# Altium PCB bt-fpc-pvt2b.PcbDoc
Units mm, origin at the board's own origin, x right, y up, seen from the top; angles counter-clockwise.
Board outline 26.25 x 79.45 mm, 2 copper layers (Top Layer, Bottom Layer), stack 0.108 mm thick; 22 components, 19 nets, 83 pads, 23 vias.
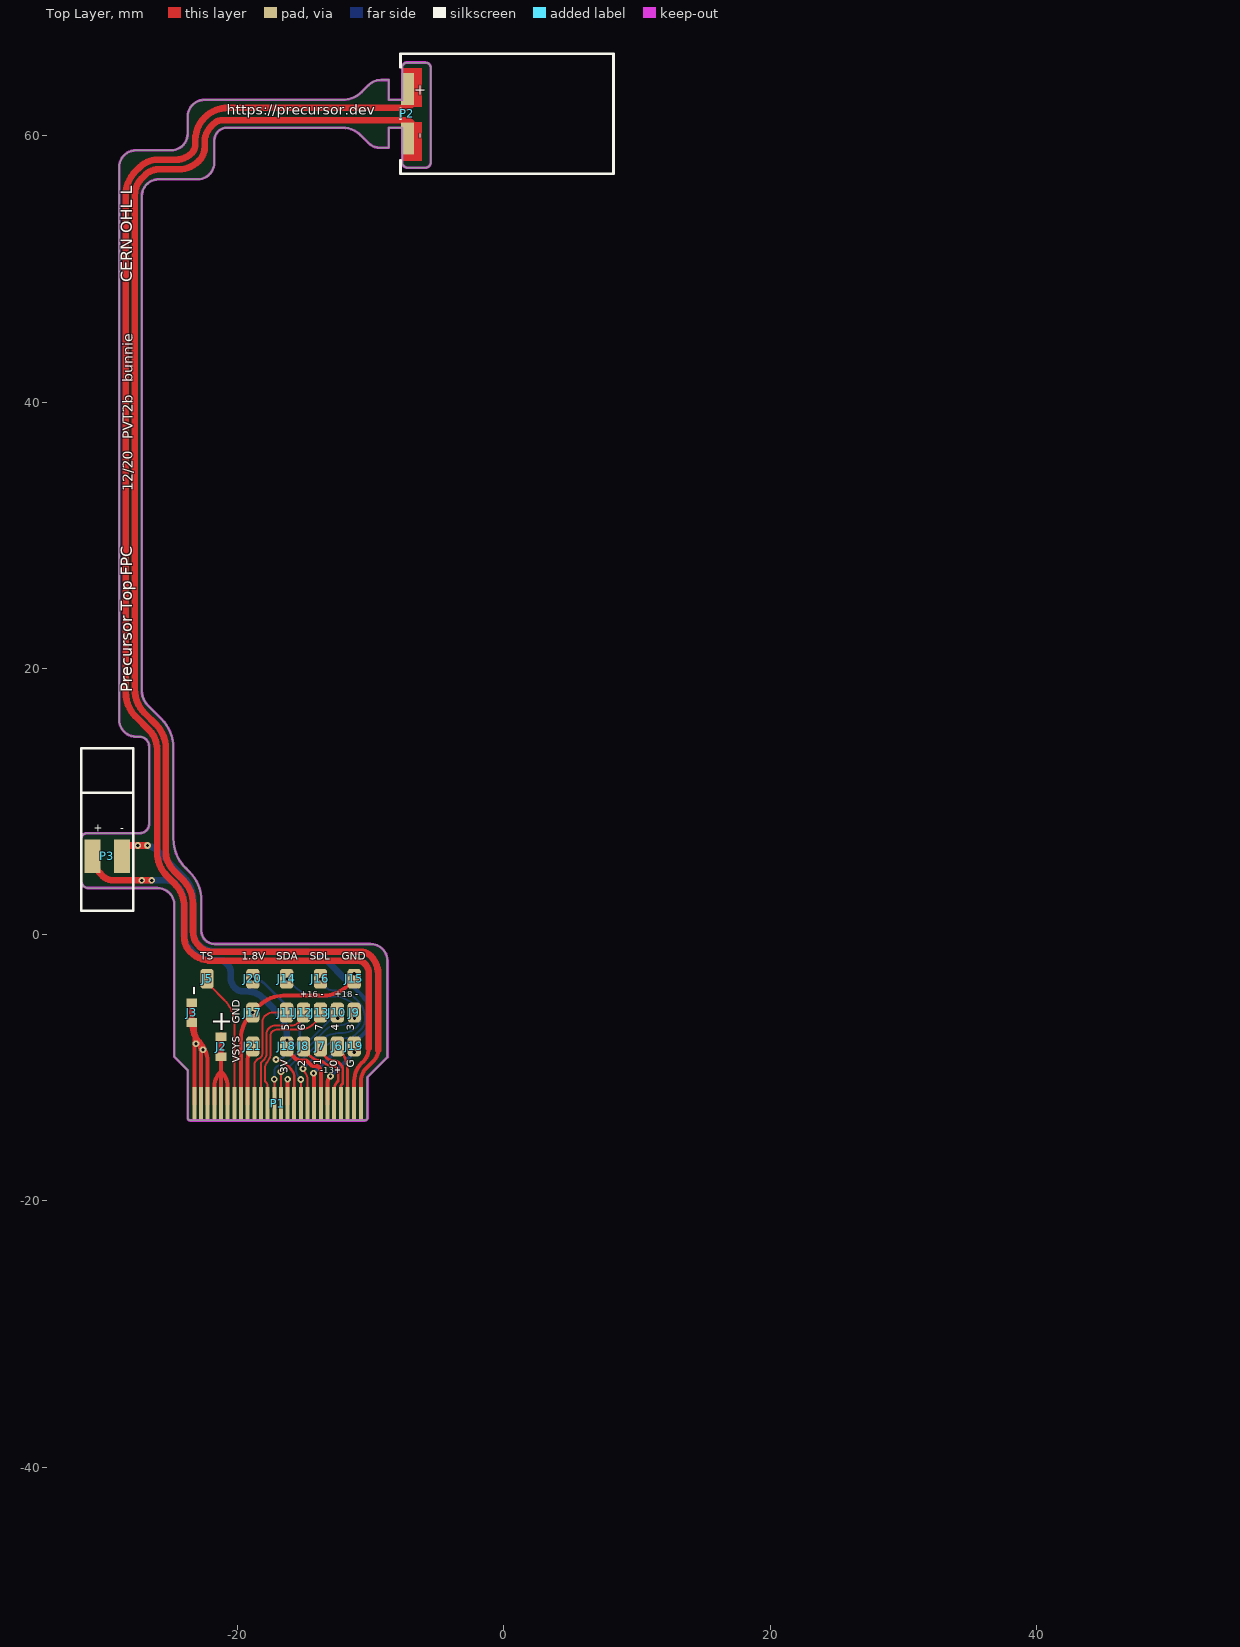
[diagram p0: Top Layer view]
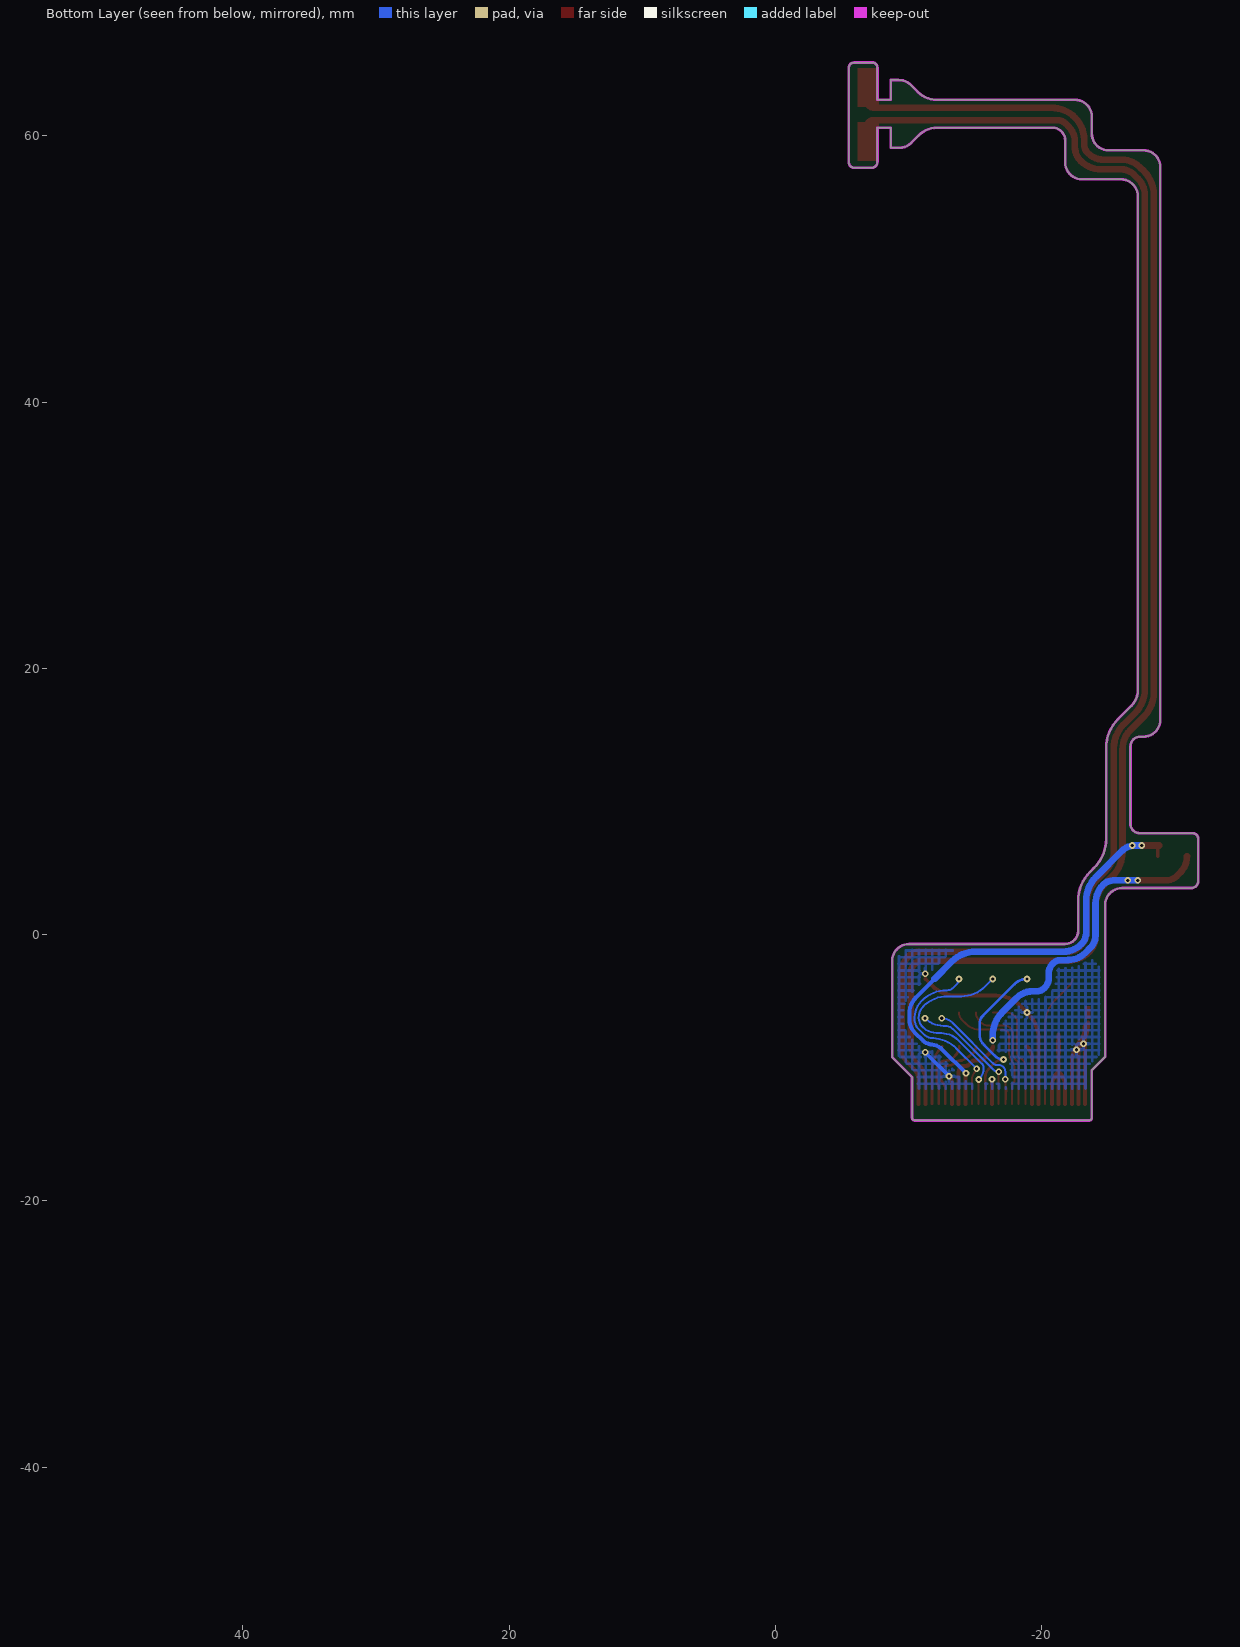
[diagram p1: Bottom Layer view, seen from below]

## Layer stack, top to bottom
Top Coverlay: solder mask 0.012, Dk 4
Top Layer: signal copper 0.02
Dielectric 2: prepreg 0.028, Composite dielectric, Dk 3.952
Dielectric 1: prepreg 0.012, Composite dielectric, Dk 3.952
Dielectric 3: prepreg 0.028, Composite dielectric, Dk 3.952
Bottom Layer: signal copper 0.02
Bottom Coverlay: solder mask 0.012, Dk 4

## Board outline
-31.2,3.5 cw(c-31.2,4.05) -31.75,4.05 -31.75,7.175 cw(c-31.3,7.175) -31.3,7.625 -27.35,7.625 ccw(c-27.35,8.325) -26.65,8.325 -26.65,14.125 ccw(c-27.4,14.125) -27.4,14.875 -27.63,14.875 cw(c-27.63,16.145) -28.9,16.145 -28.9,57.633 cw(c-27.63,57.633) -27.63,58.903 -25.023,58.903 cw(c-25.023,58.9) -25.02,58.9 ccw(c-25.02,60.17) -23.75,60.17 -23.75,61.43 cw(c-22.48,61.43) -22.48,62.7 -12.109,62.7 ccw(c-12.109,64.714) -10.685,63.29 -10.175,63.8 cw(c-9.232,62.857) -9.232,64.191 -8.65,64.191 -8.65,62.7 -7.65,62.7 -7.65,65.12 cw(c-7.27,65.12) -7.27,65.5 -5.9,65.5 cw(c-5.9,65.1) -5.5,65.1 -5.5,58 cw(c-5.9,58) -5.9,57.6 -7.22,57.6 cw(c-7.22,58.03) -7.65,58.03 -7.65,60.6 -8.65,60.6 -8.65,59.1 -9.33,59.1 cw(c-9.33,60.295) -10.175,59.45 -10.77,60.045 ccw(c-12.109,58.707) -12.109,60.6 -20.8,60.6 ccw(c-20.8,59.65) -21.75,59.65 cw(c-21.755,59.645) -21.748,59.645 -21.748,57.995 cw(c-23.018,57.995) -23.018,56.725 -25.93,56.725 ccw(c-25.93,55.455) -27.2,55.455 -27.2,18.347 ccw(c-25.578,18.347) -26.725,17.2 -25.723,16.198 cw(c-27.891,14.03) -24.825,14.03 -24.825,7.195 ccw(c-21.759,7.195) -23.927,5.027 -23.827,4.927 -23.623,4.723 cw(c-25.791,2.555) -22.725,2.555 -22.725,0.3 ccw(c-21.725,0.3) -21.725,-0.7 -10.02,-0.7 cw(c-10.02,-1.97) -8.75,-1.97 -8.75,-9.2 -10.25,-10.7 -10.25,-13.75 cw(c-10.45,-13.75) -10.45,-13.95 -23.55,-13.95 cw(c-23.55,-13.75) -23.75,-13.75 -23.75,-10.175 -24.75,-9.175 -24.75,-0.675 -24.75,2.23 ccw(c-26.02,2.23) -26.02,3.5

## Design rules (kind name [scope] priority, off if disabled: settings)
BoardOutlineClearance [All] p1: gap=0.2 ignorepadtopadclearanceinfootprint=FALSE except(0: Arc-SplitContinuation Track-SplitContinuation SMDPad-SplitContinuation THPad-SplitContinuation Via-SplitContinuation Fill-SplitContinuation Poly-SplitContinuation Region-SplitContinuation Text-SplitContinuation)
Clearance Clearance_2 [InPolygon] p1: gap=0.25 ignorepadtopadclearanceinfootprint=FALSE except(0: Arc-Hole Track-Hole SMDPad-Hole THPad-Hole Via-Hole Fill-Hole Poly-Hole Region-Hole Text-Hole)
Clearance Clearance_1 [InComponent('P1') vs OnLayer('Keep-Out Layer')] p2: gap=0 ignorepadtopadclearanceinfootprint=FALSE
Clearance [All] p3: gap=0.15 ignorepadtopadclearanceinfootprint=FALSE except(0: Arc-Hole Track-Hole SMDPad-Hole THPad-Hole Via-Hole Fill-Hole Poly-Hole Region-Hole Text-Hole)
ComponentClearance [All] p1 off: gap=0.254 collisioncheckmode=3 verticalgap=0.254 showdistances=FALSE
Height [All] p1 off: minheight=0 maxheight=25.4 prefheight=12.7
MinimumSolderMaskSliver [All] p1 off: minsoldermaskwidth=0.254
PolygonConnect [All] p1: connectstyle=Relief reliefconductorwidth=0.25 reliefentries=4 polygonreliefangle="90 Angle" airgapwidth=0.15
RoomDefinition fpc [InComponentClass('fpc')] p1 off: confinementstyle=ConfineIn formatcopy=TRUE lockcomponents=FALSE outline -31.975,1.2 -33.1,1.2 -33.1,-7.875 -31.975,-7.875
RoutingVias [All] p1: holewidth=0.35 width=0.8 viastyle="Through Hole" minholewidth=0.25 minwidth=0.5 maxholewidth=0.7 maxwidth=1
SilkToSilkClearance [All] p1 off: silktosilkclearance=0.254
SilkToSolderMaskClearance [IsPad] p1 off: minsilkscreentomaskgap=0.254 clearancetoexposedcopper=TRUE
SolderMaskExpansion [All] p1: expansion=0.102 istentingtop=FALSE
Width [All] p1: maxlimit=5 minlimit=0.15 preferedwidth=0.15
25 further rules are at their usual default settings.

## Components (designator, comment, footprint, x,y, rotation, side; value= is the part's Value field where it differs from the comment)
J2 "power tap (DNP)" RESTAP-0603 -21.248,-8.423 r270 top
J3 "power tap (DNP)" RESTAP-0603 -23.45,-5.85 r90 top
J5 "TP (DNP)" TP_1.5x1_SMT#1 -22.3,-3.35 r0 top
J6 "TP (DNP)" TP_1.5x1_SMT#2 -12.51,-8.39 r0 top
J7 "TP (DNP)" TP_1.5x1_SMT#2 -13.78,-8.39 r0 top
J8 "TP (DNP)" TP_1.5x1_SMT#2 -15.05,-8.39 r0 top
J9 "TP (DNP)" TP_1.5x1_SMT#2 -11.24,-5.85 r0 top
J10 "TP (DNP)" TP_1.5x1_SMT#2 -12.51,-5.85 r180 top
J11 "TP (DNP)" TP_1.5x1_SMT#2 -16.32,-5.85 r0 top
J12 "TP (DNP)" TP_1.5x1_SMT#2 -15.05,-5.85 r180 top
J13 "TP (DNP)" TP_1.5x1_SMT#2 -13.78,-5.85 r180 top
J14 "TP (DNP)" TP_1.5x1_SMT#2 -16.32,-3.31 r180 top
J15 "TP (DNP)" TP_1.5x1_SMT#2 -11.24,-3.31 r180 top
J16 "TP (DNP)" TP_1.5x1_SMT#2 -13.78,-3.31 r180 top
J17 "TP (DNP)" TP_1.5x1_SMT#2 -18.86,-5.85 r180 top
J18 "TP (DNP)" TP_1.5x1_SMT#2 -16.32,-8.39 r180 top
J19 "TP (DNP)" TP_1.5x1_SMT#2 -11.24,-8.39 r180 top
J20 "TP (DNP)" TP_1.5x1_SMT#2 -18.86,-3.31 r180 top
J21 "TP (DNP)" TP_1.5x1_SMT#2 -18.86,-8.39 r0 top
P1 "26-pin FPC" HRS_FH34SRJ-26S-FPC-TOP -17,-12.7 r0 top
P2 "CMS-16093-076SP-67" CUI_CMS-16093-076SP-67 -7.25,61.65 r270 top
P3 "Jinlong Z32TH7B2882001D" JINLONG_Z32TH7B2882001D -29.8,5.9 r270 top

## Footprints (in the part's own frame and the unit in brackets; to place one, negate y for a bottom-side part, rotate by r counter-clockwise, add the part's x,y. Pads: shape width x height; smd on the part's side, far side on the other; paste and mask are expansions set on the pad)
CUI_CMS-16093-076SP-67 [mm] "CUI IP67 rated speaker"
  rect 2.4x1 smd mask+0.1: 1(1.85,0) 2(-1.85,0)
  silkscreen extent -4.5,-0.53 4.5,15.48, body extent -4.5,-0.52 4.5,15.48, height 3.1
HRS_FH34SRJ-26S-FPC-TOP [mm] "FPC pattern for mating to FH34SRJ-26S"
  rect 0.3x2.5 smd mask+0.07: 1(-6.25,0) 2(-5.75,0) 3(-5.25,0) 4(-4.75,0) 5(-4.25,0) 6(-3.75,0) 7(-3.25,0) 8(-2.75,0) 9(-2.25,0) 10(-1.75,0) 11(-1.25,0) 12(-0.75,0) 13(-0.25,0) 14(0.25,0) 15(0.75,0) 16(1.25,0) 17(1.75,0) 18(2.25,0) 19(2.75,0) 20(3.25,0) 21(3.75,0) 22(4.25,0) 23(4.75,0) 24(5.25,0) 25(5.75,0) 26(6.25,0)
JINLONG_Z32TH7B2882001D [mm] "Vibration motor, contact pads"
  rect 2.5x1.2 smd mask+0.05: 1(0,-1.1) 2(0,1.1)
  silkscreen extent -8.1,-1.95 4.1,1.95, body extent -8.1,-1.95 4.1,1.95, height 4
RESTAP-0603 [mm] "0603 Power tap, cut-trace style"
  rect 0.65x0.8 smd: 1(-0.75,0) 1(0.75,0)
  Top Layer region: -0.5,-0.2 0.5,-0.2 0.5,0.2 -0.5,0.2
  body extent -0.8,-0.4 0.8,0.4, height 0.8
TP_1.5x1_SMT#1 [mm] "Test point 1.5x1mm SMT"
  rrect50% 1x1.5 smd mask+0.07: 1(0,0.04)
TP_1.5x1_SMT#2 [mm] "Test point 1.5x1mm SMT"
  rrect50% 1x1.5 smd mask+0.07: 1(0,0)

## Part data
J2 J3 J5 J6 J7 J8 J9 J10 J11 J12 J13 J14 J15 J16 J17 J18 J19 J20 J21: library part CON1, "Connector", MPN=DNP, MYPN=J-TP-PWRTAP-0603, VENDOR=DNP
P1: library part FPC-26, "26 Pin FPC footprint", MPN=DNP, MYPN=DNP, System=Connector, VENDOR="FPC pattern"
P2: library part "Header 2", LatestRevisionDate=17-Jul-2002, LatestRevisionNote="Re-released for DXP Platform.", MPN=CMS-16093-076SP-67, MYPN=SPK-CMS-16093-076SP-67, Publisher="Altium Limited", VENDOR=CUI
P3: library part "Header 2", MPN=Z32TH7B2882001D, LatestRevisionDate=17-Jul-2002, LatestRevisionNote="Re-released for DXP Platform.", MYPN=M-JL-Z32TH7B2882001D, Publisher="Altium Limited", VENDOR=Jinlong

## Free pads (board coordinates)
  rect 0.3x1.6 on Mech1 mask+0.05: 1(44.25,-45.125) 2(44.75,-45.125) 3(45.25,-45.125) 4(45.75,-45.125) 5(46.25,-45.125) 6(46.75,-45.125) 7(47.25,-45.125) 8(47.75,-45.125) 9(48.25,-45.125) 10(48.75,-45.125) 11(49.25,-45.125) 12(49.75,-45.125) 13(50.25,-45.125) 14(50.75,-45.119) 15(51.25,-45.125) 16(51.75,-45.125) 17(51.75,-48.725) 18(51.25,-48.725) 19(50.75,-48.725) 20(50.25,-48.721) 21(49.75,-48.725) 22(49.25,-48.725) 23(48.75,-48.725) 24(48.25,-48.725) 25(47.75,-48.725) 26(47.25,-48.725) 27(46.75,-48.725) 28(46.25,-48.725) 29(45.75,-48.725) 30(45.25,-48.725) 31(44.75,-48.725) 32(44.25,-48.725)

## Via types
v1: diameter 0.5, hole 0.25, Top Layer to Bottom Layer, tented both sides, 23 vias

## Nets (pads, with @x,y where several pads share a name; then routed paths per layer and width w, separated by ;. In a path a pad name is that pad's centre, name@x,y a point inside that pad or via, vN(x,y) a via of type N, cw(c..) or ccw(c..) an arc to the next point about the centre after c; other vN are vias at no path point)
CHG_TS: J5.1 P1.7 | length 10.1
  Top Layer w0.15: J5.1 ccw(c-21.6,-3.31) -22.095,-3.805 -20.994,-4.906 cw(c-22.79,-6.702) -20.25,-6.702 P1.7
GND: J3.1 J15.1 J17.1 J19.1 P1.1 P1.2 P1.3 P1.8 P1.15 P1.21 | length 41.6
  Top Layer w0.3: P1.1 -23.25,-7.706 ccw(c-23.565,-7.706) -23.255,-7.648 ; P1.2 -22.75,-9.1 ccw(c-25.225,-9.1) -23.074,-7.876 ; P1.3 -22.25,-9.627 ccw(c-24.79,-9.627) -22.605,-8.331 ; P1.8 -19.75,-7.792 cw(c-17.21,-7.792) -19.006,-5.996 J17.1 ; v1(-18.875,-5.85) -18.344,-5.319 cw(c-16.548,-7.115) -16.548,-4.575 -13.557,-4.575 ccw(c-13.557,-2.035) -11.761,-3.831 J15.1 ; P1.15 v1(-16.25,-10.85) ; P1.21 -13.25,-11.168 cw(c-12.482,-11.168) v1(-13.025,-10.625) ; -23.332,-7.506 ccw(c-22.166,-6.969) -23.255,-7.648 ; -23.332,-7.506 cw(c-25.225,-9.1) -23.282,-7.567 ; -23.332,-7.506 cw(c-22.166,-6.969) -23.342,-7.483 cw(c-22.166,-6.969) -23.45,-6.969 -23.45,-6.6 -23.306,-6.743 cw(c-23.563,-7) -23.2,-7 ccw(c-21.421,-7) -22.994,-7.831 ; -23.282,-7.567 cw(c-23.565,-7.706) -23.255,-7.648 ; -23.282,-7.567 cw(c-25.225,-9.1) -23.074,-7.876 ; -23.282,-7.567 ccw(c-23.565,-7.706) -23.342,-7.483 -22.994,-7.831 ; -23.255,-7.648 ccw(c-22.166,-6.969) -23.074,-7.876 ; -22.994,-7.831 cw(c-24.79,-9.627) -22.605,-8.331 ; -22.994,-7.831 ccw(c-21.421,-7) -22.679,-8.258 -22.605,-8.331
  Bottom Layer w0.3: v1(-13.025,-10.625) -11.268,-8.868 ccw(c-11.31,-8.825) v1(-11.25,-8.825)
  other v1: -22.6,-8.65 -23.125,-8.2 -11.25,-2.925
GPIO0: J6.1 P1.24 | length 4.5
  Top Layer w0.2: J6.1 -12.494,-8.406 cw(c-14.29,-10.202) -11.75,-10.202 P1.24
GPIO1: J7.1 P1.23 | length 5.3
  Top Layer w0.2: J7.1 ccw(c-12.802,-8.39) -13.494,-9.081 -13.319,-9.256 ccw(c-12.85,-8.786) -12.85,-9.45 cw(c-12.85,-10.174) -12.338,-9.662 -12.275,-9.725 cw(c-12.697,-10.147) -12.103,-10.083 cw(c-12.302,-10.104) -12.103,-10.092 cw(c-14.29,-10.202) -12.1,-10.192 -12.1,-11.069 cw(c-12.356,-11.069) -12.175,-11.25 ccw(c-11.994,-11.431) -12.25,-11.431 P1.23
GPIO2: J8.1 P1.22 | length 6
  Top Layer w0.2: J8.1 ccw(c-14.362,-8.39) -14.849,-8.876 ccw(c-14.707,-8.735) -14.832,-8.892 -14.341,-9.281 ccw(c-14.03,-8.89) -14.203,-9.359 -13.991,-9.438 ccw(c-13.921,-9.25) -13.921,-9.45 -13.85,-9.45 cw(c-13.85,-9.872) -13.551,-9.574 -13.547,-9.578 ccw(c-12.95,-8.98) -12.95,-9.825 cw(c-12.95,-10.368) -12.566,-9.984 -12.525,-10.025 cw(c-12.706,-10.206) -12.45,-10.206 -12.45,-10.914 cw(c-12.65,-10.914) -12.485,-11.026 cw(c-12.766,-10.834) -12.525,-11.075 ccw(c-11.982,-11.618) -12.75,-11.618 P1.22
GPIO3: J9.1 P1.14 | length 9.5
  Top Layer w0.15: P1.14 v1(-16.75,-10.3)
  Bottom Layer w0.15: v1(-16.75,-10.3) ccw(c-16.75,-9.758) -16.366,-10.141 -13.305,-7.08 cw(c-12.75,-7.635) -12.75,-6.85 -12.613,-6.85 ccw(c-12.613,-4.887) v1(-11.225,-6.275)
GPIO4: J10.1 P1.13 | length 10.1
  Top Layer w0.15: P1.13@-17.325,-11.525 P1.13 -17.25,-11.35 ; -17.251,-11.336 cw(c-17.4,-11.35) -17.25,-11.35 ; v1(-17.25,-10.85) -17.25,-11.35
  Bottom Layer w0.15: v1(-17.25,-10.85) -17.25,-10.287 cw(c-16.738,-10.287) -17.1,-9.925 cw(c-16.798,-10.227) -16.798,-9.8 -16.7,-9.8 ccw(c-16.7,-9.257) -16.316,-9.641 -13.286,-6.611 cw(c-12.475,-7.422) v1(-12.475,-6.275)
GPIO5: J11.1 P1.10 | length 8.6
  Top Layer w0.15: P1.10 -18.75,-9.847 cw(c-18.153,-9.847) -18.575,-9.425 -18.53,-9.38 cw(c-18.425,-9.487) -18.47,-9.344 ccw(c-18.61,-8.89) -18.135,-8.89 -18.135,-8.885 cw(c-17.985,-8.886) -18.133,-8.86 ccw(c-18.611,-8.774) -18.125,-8.774 -18.125,-6.487 cw(c-17.613,-6.487) -17.975,-6.125 cw(c-17.311,-6.789) -17.311,-5.85 J11.1
GPIO6: J12.1 P1.11 | length 9.1
  Top Layer w0.15: P1.11 -18.25,-9.706 cw(c-17.994,-9.706) -18.213,-9.574 cw(c-18.085,-9.651) -18.173,-9.53 ccw(c-18.61,-8.89) -17.835,-8.907 cw(c-17.685,-8.912) -17.834,-8.891 ccw(c-18.611,-8.774) -17.825,-8.774 -17.825,-7.412 cw(c-17.313,-7.412) -17.675,-7.05 cw(c-17.132,-7.593) -17.132,-6.825 -15.968,-6.825 ccw(c-15.968,-6.057) -15.425,-6.6 -15.315,-6.49 ccw(c-15.955,-5.85) J12.1
GPIO7: J13.1 P1.12 | length 9.9
  Top Layer w0.15: P1.12 -17.75,-11.412 ccw(c-18.262,-11.412) -17.9,-11.05 cw(c-17.779,-10.929) -17.95,-10.933 cw(c-17.8,-10.93) -17.95,-10.93 -17.95,-10.064 cw(c-17.104,-10.064) -17.839,-9.645 cw(c-17.709,-9.72) -17.82,-9.619 ccw(c-18.61,-8.89) -17.702,-9.466 ccw(c-18.61,-8.89) -17.536,-8.931 cw(c-17.386,-8.938) -17.535,-8.919 ccw(c-18.611,-8.774) -17.525,-8.774 -17.525,-7.541 cw(c-17.184,-7.541) -17.425,-7.3 cw(c-17.003,-7.722) -17.003,-7.125 -15.326,-7.125 ccw(c-15.326,-5.674) -14.3,-6.7 -14.013,-6.413 ccw(c-14.577,-5.85) J13.1
I2C0_SCL: J16.1 P1.18 | length 13.9
  Top Layer w0.15: v1@-15.05,-10.2 cw(c-15.774,-10.924) -14.75,-10.924 P1.18
  Bottom Layer w0.15: v1(-15.094,-10.064) -13.549,-8.519 cw(c-11.753,-10.315) -11.799,-7.775 ; v1(-13.775,-3.325) ccw(c-13.232,-3.325) -13.616,-3.709 -13.344,-3.981 ccw(c-12.875,-3.511) -12.875,-4.175 -12.827,-4.175 cw(c-12.827,-6.715) -11.031,-4.919 -10.937,-5.012 cw(c-12.114,-6.189) -10.45,-6.189 -10.45,-6.446 cw(c-11.304,-6.446) -10.7,-7.05 -11.118,-7.468 cw(c-11.865,-6.721) -11.799,-7.775 ; -11.865,-7.777 ccw(c-11.865,-6.721) -11.799,-7.775
I2C0_SDA: J14.1 P1.17 | length 16.2
  Top Layer w0.15: P1.17 v1(-15.25,-10.875)
  Bottom Layer w0.15: v1(-16.3,-3.325) -15.744,-3.881 ccw(c-13.948,-2.085) -13.948,-4.625 -12.902,-4.625 cw(c-12.902,-7.165) -11.106,-5.369 cw(c-11.966,-6.229) -10.75,-6.229 -10.75,-6.275 cw(c-11.579,-6.275) -10.993,-6.861 -11.282,-7.15 cw(c-12.284,-5.266) -12.284,-7.4 -12.45,-7.4 ccw(c-12.45,-9.211) -13.73,-7.93 -15.484,-9.684 ccw(c-15.142,-10.025) -15.625,-10.025 ccw(c-14.478,-10.025) -15.289,-10.836 v1(-15.25,-10.875)
P1.8V: J20.1 P1.16 | length 12.7
  Top Layer w0.2: v1(-17.117,-9.374) cw(c-17.117,-10.317) -16.45,-9.65 -16,-10.1 cw(c-16.604,-10.704) -15.75,-10.704 P1.16
  Bottom Layer w0.2: v1(-18.875,-3.325) cw(c-18.875,-4.653) -17.936,-3.714 -15.572,-6.078 cw(c-16.17,-6.675) -15.325,-6.675 -15.325,-7.49 cw(c-16.435,-7.49) -15.65,-8.275 -16.489,-9.114 cw(c-17.117,-8.486) v1(-17.117,-9.374)
P3.3V: J18.1 P1.20 P3.1 | length 30.9
  Top Layer w0.3: J18.1@-16.133,-8.842 -15.85,-9.125 -15.775,-9.2 ccw(c-15.175,-8.605) -15.714,-9.256 cw(c-15.905,-9.487) -15.692,-9.276 ccw(c-15.3,-8.89) -15.32,-9.44 cw(c-15.33,-9.739) -15.29,-9.442 ccw(c-15.175,-8.605) -15.175,-9.45 -14.91,-9.45 cw(c-14.91,-9.535) -14.85,-9.475 cw(c-14.85,-9.596) -14.765,-9.51 -14.531,-9.744 ; J18.1@-16.133,-8.842 cw(c-15.68,-8.39) J18.1 J18.1@-16.07,-8.86 ; -14.531,-9.744 ccw(c-14.275,-9.488) -14.275,-9.85 -14.141,-9.85 cw(c-14.141,-10.191) -13.9,-9.95 cw(c-14.262,-10.312) -13.75,-10.312 P1.20
  Top Layer w0.5: P3.1 ccw(c-29.15,5.9) -30.387,4.662 -30.15,4.425 ccw(c-29.305,5.27) -29.305,4.075 v1(-27.202,4.075) v1(-26.45,4.075)
  Bottom Layer w0.5: v1(-27.202,4.075) v1(-26.45,4.075) -25.349,4.075 cw(c-25.349,3.051) -24.625,3.775 cw(c-26.074,2.326) -24.025,2.326 -24.025,-0.07 ccw(c-22.745,-0.07) -23.65,-0.975 -23.259,-1.366 ccw(c-21.975,-0.082) -21.975,-1.898 ccw(c-21.6,0.656) -21.6,-1.925 -21.307,-1.925 cw(c-21.308,-2.425) -21.025,-2.013 cw(c-21.95,-3.355) -20.798,-2.202 -20.775,-2.225 cw(c-21.379,-2.829) -20.525,-2.829 -20.525,-3.215 ccw(c-19.415,-3.215) -20.2,-4 ccw(c-19.596,-3.396) -19.596,-4.25 -19.3,-4.25 cw(c-19.3,-5.94) -18.105,-4.745 -17.044,-5.806 cw(c-18.84,-7.602) -16.3,-7.602 v1(-16.3,-7.925)
PACK_P: J2.1 P1.4 P1.5 P1.6 | length 10.4
  Top Layer w0.3: P1.4 -21.75,-11.457 cw(c-20.043,-11.457) -21.25,-10.25 ; P1.5 -21.25,-10.25 ; -21.24,-10.25 J2.1@-21.24,-7.5 ; P1.6 -20.75,-11.457 ccw(c-22.457,-11.457) -21.25,-10.25
SPK+: P1.25 P2.2 | length 107.9
  Top Layer w0.3: P1.25 -11.25,-10.978 cw(c-9.372,-10.978) -10.7,-9.65 -10.557,-9.507 ccw(c-11.538,-8.525) -10.15,-8.525
  Top Layer w0.5: -10.15,-8.525 -10.15,-2.899 ccw(c-11.174,-2.899) -10.45,-2.175 ccw(c-10.993,-2.718) -10.993,-1.95 -21.945,-1.95 cw(c-21.945,0.355) -23.575,-1.275 cw(c-22.549,-0.249) -24,-0.249 -24,2.048 ccw(c-26.54,2.048) -24.744,3.844 -25.306,4.406 cw(c-23.51,6.202) -26.05,6.202 -26.05,13.926 ccw(c-28.099,13.926) -26.65,15.375 -27.656,16.381 cw(c-25.86,18.177) -28.4,18.177 -28.4,34.67 -28.4,55.548 cw(c-25.86,55.548) -27.656,57.344 -27.372,57.628 cw(c-25.991,56.248) -25.991,58.2 -24.657,58.2 ccw(c-24.657,59.907) -23.45,58.7 ccw(c-24.114,59.364) -23.175,59.364 -23.175,59.7 cw(c-20.821,59.7) -22.486,61.364 -22.475,61.375 cw(c-20.725,59.625) -20.725,62.1 -7.422,62.1 ccw(c-7.422,62.697) -7,62.275
SPK-: P1.26 P2.1 | length 106.8
  Top Layer w0.3: P1.26 -10.75,-11.026 cw(c-9.299,-11.026) -10.325,-10 -9.768,-9.443 ccw(c-10.536,-8.675) -9.45,-8.675
  Top Layer w0.5: -9.45,-8.675 -9.45,-2.928 ccw(c-11.328,-2.928) -10,-1.6 ccw(c-10.785,-2.385) -10.785,-1.275 -21.98,-1.275 cw(c-21.98,-0.08) -22.825,-0.925 -22.908,-0.842 cw(c-21.841,0.225) -23.35,0.225 -23.35,2.298 ccw(c-25.89,2.298) -24.086,4.086 ccw(c-26.54,2.048) -24.192,4.207 ccw(c-26.54,2.048) -24.284,4.303 -24.806,4.825 cw(c-24.451,5.177) -24.821,4.841 cw(c-22.935,6.542) -25.329,5.693 cw(c-24.857,5.858) -25.341,5.732 cw(c-23.51,6.202) -25.4,6.202 -25.4,13.998 ccw(c-27.94,13.998) -26.144,15.794 -26.981,16.631 cw(c-25.185,18.427) -27.725,18.427 -27.725,55.533 cw(c-25.933,55.533) -27.2,56.8 -26.928,57.072 cw(c-25.956,56.101) -25.956,57.475 -24.469,57.475 ccw(c-24.469,59.694) -22.9,58.125 ccw(c-23.926,59.151) -22.475,59.151 -22.475,59.553 cw(c-20.853,59.553) -22,60.7 -21.804,60.896 cw(c-21.131,60.224) -21.131,61.175 -7.397,61.175 cw(c-7.397,60.578) -6.975,61
VIBE_DRIVE: P1.19 P3.2 | length 36.8
  Top Layer w0.3: P3.2@-28.8,6.7 cw(c-29.041,6.459) -28.7,6.459 P3.2 ; v1(-14.3,-10.4) cw(c-14.421,-10.52) -14.25,-10.52 P1.19
  Top Layer w0.5: P3.2@-28.8,6.7 v1(-27.505,6.7) v1(-26.775,6.7)
  Bottom Layer w0.3: v1(-14.3,-10.4) -12.55,-8.649 cw(c-11.525,-9.674) -11.729,-8.239 ; -11.931,-3.319 -10.565,-4.685 cw(c-11.808,-5.928) -10.05,-5.928 -10.05,-6.349 cw(c-11.501,-6.349) -10.475,-7.375 -11.064,-7.964 cw(c-11.729,-7.3) -11.569,-8.226 ; -11.525,-8.225 ccw(c-11.525,-9.674) -11.569,-8.226 ; -11.729,-8.239 ccw(c-11.729,-7.3) -11.569,-8.226 ; -11.729,-8.239 cw(c-11.525,-9.674) -11.569,-8.226
  Bottom Layer w0.5: v1(-27.505,6.7) -26.991,6.7 cw(c-26.991,5.334) -26.025,6.3 -24.069,4.344 cw(c-25.865,2.548) -23.325,2.548 -23.325,0.145 ccw(c-22.13,0.145) -22.975,-0.7 -22.966,-0.709 ccw(c-21.6,0.656) -21.6,-1.275 -15.027,-1.275 cw(c-15.027,-3.815) -13.231,-2.019 -11.931,-3.319
VSYS_U: J21.1 P1.9 | length 4.4
  Top Layer w0.3: P1.9 -19.25,-9.331 cw(c-17.919,-9.331) J21.1

## Polygon pours and split planes (outlines as drawn)
GND on Bottom Layer "GND_L02_P000" (hatched 90Degree grid 0.5 track 0.2, remove dead copper, pour order 0): -24.757,-11.55 -10.075,-11.55 -8.45,-9.925 -8.45,-1.822 ccw(c-10.072,-1.822) -8.925,-0.675 -21.473,-0.675 ccw(c-21.473,-3.215) -23.269,-1.419 -25.1,-3.25 -25.1,-14.788 ccw(c-29.233,-12.687) -24.825,-11.25

## Keep-outs
Keep-Out Layer:
  lines w0.2: -28.9,34.602 -28.9,57.633 cw(c-27.63,57.633) -27.63,58.903 -25.023,58.903 cw(c-25.023,58.9) -25.02,58.9 ccw(c-25.02,60.17) -23.75,60.17 -23.75,61.43 cw(c-22.48,61.43) -22.48,62.7 -12.109,62.7 ccw(c-12.109,64.714) -10.685,63.29 -10.175,63.8 cw(c-9.232,62.857) -9.232,64.191 -8.65,64.191 -8.65,62.7 -7.65,62.7 -7.65,65.12 cw(c-7.27,65.12) -7.27,65.5 -5.9,65.5 cw(c-5.9,65.1) -5.5,65.1 -5.5,61.5 -5.5,58 cw(c-5.9,58) -5.9,57.6 -7.22,57.6 cw(c-7.22,58.03) -7.65,58.03 -7.65,60.6 -8.65,60.6 -8.65,59.1 -9.225,59.1 -9.33,59.1 cw(c-9.33,60.295) -10.175,59.45 -10.77,60.045 ccw(c-12.109,58.707) -12.109,60.6 -20.8,60.6 ccw(c-20.8,59.65) -21.75,59.65 cw(c-21.755,59.645) -21.748,59.645 -21.748,57.995 cw(c-23.018,57.995) -23.018,56.725 -25.93,56.725 ccw(c-25.93,55.455) -27.2,55.455 -27.2,35.055 -27.2,18.347 ccw(c-25.578,18.347) -26.725,17.2 -25.723,16.198 cw(c-27.891,14.03) -24.825,14.03 -24.825,7.195 ccw(c-21.759,7.195) -23.927,5.027 -23.827,4.927 -23.623,4.723 cw(c-25.791,2.555) -22.725,2.555 -22.725,0.3 ccw(c-21.725,0.3) -21.725,-0.7 -10.02,-0.7 cw(c-10.02,-1.97) -8.75,-1.97 -8.75,-4.269 -8.75,-9.2 -10.25,-10.7 -10.25,-13.75 cw(c-10.45,-13.75) -10.45,-13.95 -23.55,-13.95 cw(c-23.55,-13.75) -23.75,-13.75 -23.75,-10.7 -23.75,-10.175 -24.75,-9.175 -24.75,-0.675 -24.75,2.23 ccw(c-26.02,2.23) -26.02,3.5 -31.2,3.5 cw(c-31.2,4.05) -31.75,4.05 -31.75,7.175 cw(c-31.3,7.175) -31.3,7.625 -27.35,7.625 ccw(c-27.35,8.325) -26.65,8.325 -26.65,14.125 ccw(c-27.4,14.125) -27.4,14.875 -27.63,14.875 cw(c-27.63,16.145) -28.9,16.145 -28.9,16.4 -28.9,29.5 -28.9,34.7

## Other copper
Top Layer:
  region net SPK+: -6.15,65.1 -7.75,65.1 -7.75,62.15 -6.15,62.15
  rectangle net SPK-: -7.75,58.1 -6.15,61.05

## Silkscreen, mask and mechanical layers (free items; w line width, h text height)
Top Overlay:
  text "https://precursor.dev" at -20.8,61.3 h1.3
  text "CERN OHL L" at -27.6,49 h1.5 r90
  text "bunnie" at -27.6,41.5 h1.3 r90
  text "PVT2b" at -27.6,37.2 h1.3 r90
  text "12/20" at -27.6,33.3 h1.3 r90
  text "Precursor Top FPC" at -27.6,18.2 h1.5 r90
  text "+     -" at -30.8,7.5 h1
  text "TS" at -22.8,-2.1 h1
  text "1.8V" at -19.7,-2.1 h1
  text "SDA" at -17.1,-2.1 h1
  text "SDL" at -14.6,-2.1 h1
  text "GND" at -12.2,-2.1 h1
  text "-" at -22.7,-4.6 h1.5 r90
  text "+16 -" at -15.3,-4.9 h0.8
  text "+18 -" at -12.7,-4.9 h0.8
  text "GND" at -19.6,-6.7 h1 r90
  text "+" at -22.054,-7.187 h1.5
  text "5" at -15.9,-7.2 h1 r90
  text "6" at -14.7,-7.2 h1 r90
  text "7" at -13.4,-7.2 h1 r90
  text "4" at -12.2,-7.2 h1 r90
  text "3" at -11,-7.2 h1 r90
  text "VSYS" at -19.6,-9.6 h1 r90
  text "1" at -13.5,-9.8 h1 r90
  text "2" at -14.7,-9.9 h1 r90
  text "0" at -12.3,-9.9 h1 r90
  text "G" at -11,-10 h1 r90
  text "3V" at -16,-10.4 h1 r90
  text "-13+" at -13.8,-10.6 h0.8
Top Coverlay:
  rectangle: -24,-13.95 -10,-12.45
Mechanical 1:
  drawing of 2662 lines, arcs and shapes, not listed
  text "1.00" at -7.68,117.37 h3.5
  text "1.15" at -2.946,99.757 h3.5 r30
  text "SECTION B-B" at 28.578,99.445 h3.5
  text "0.58" at -28.984,91.474 h3.5 r90
  text "A" at -12.355,89.829 h3.5
  text "9.00" at -17.332,77.153 h3.5
  text "note 0.15mm + 0.1mm offset of speaker to right to accommodate \"ramp\" + tolerance" at 0.2,70.093 h1.5
  text "B" at -49.691,54.644 h3.5
  text "B" at 42.405,54.644 h3.5
  text "61.65" at -45.767,29.823 h3.5 r90
  text "17.00" at -12.07,-1.037 h3.5
  text "1.08" at -91.172,-3.826 h3.5
  text "3.1mm hypot" at -95.5,-12.999 h1.5
  text "13.75" at -58.891,-14.115 h3.5 r90
  text "2.9mm run" at -95.6,-15.599 h1.5
  text "SECTION A-A" at -60.238,-84.772 h3.5
  text "A" at -12.355,-92.041 h3.5
Mechanical 2:
  lines w0.2: -28.9,34.602 -28.9,57.633 cw(c-27.63,57.633) -27.63,58.903 -25.023,58.903 ; -28.9,34.7 -28.9,29.5 -28.9,16.4 -28.9,16.145 ccw(c-27.63,16.145) -27.63,14.875 -27.4,14.875 ; -21.75,57.815 ccw(c-21.75,57.816) -21.748,57.816 -21.748,59.65 ; -7.675,60.6 -7.65,60.575 -7.65,58.03 ; -27.4,14.875 cw(c-27.4,14.125) -26.65,14.125 ; -27.4,14.875 cw(c-27.4,14.125) -26.65,14.125 ; -26.65,8.325 cw(c-27.35,8.325) -27.35,7.625 -31.3,7.625 ccw(c-31.3,7.175) -31.75,7.175 -31.75,4.05 ccw(c-31.2,4.05) -31.2,3.5 -26.02,3.5 cw(c-26.02,2.23) -24.75,2.23 ; -26.65,8.325 -26.65,14.125 ; -26.65,8.325 -26.65,14.125 ; -24.75,-9.175 -24.75,-0.675 ; -24.75,-9.175 -23.75,-10.175 ; -24.75,-9.175 -24.75,-0.675 ; -24.75,-9.175 -23.75,-10.175 ; -24.75,-0.675 -24.75,2.23 ; -24.75,-0.675 -24.75,2.23 ; -23.75,-13.75 ccw(c-23.55,-13.75) -23.55,-13.95 ; -23.75,-13.75 ccw(c-23.55,-13.75) -23.55,-13.95 ; -23.75,-13.75 -23.75,-10.7 ; -23.75,-13.75 -23.75,-10.7 ; -23.75,-10.7 -23.75,-10.175 ; -23.75,-10.7 -23.75,-10.175 ; -23.75,60.17 cw(c-25.02,60.17) -25.02,58.9 ccw(c-25.02,60.17) -23.75,60.17 ; -23.75,60.17 -23.75,61.43 ; -23.75,60.17 -23.75,61.43 ; -23.75,61.43 cw(c-22.48,61.43) -22.48,62.7 ; -23.75,61.43 cw(c-22.48,61.43) -22.48,62.7 ; -23.55,-13.95 -10.45,-13.95 ; -23.55,-13.95 -10.45,-13.95 ; -22.48,62.7 -12.109,62.7 ccw(c-12.109,64.714) -10.685,63.29 -10.175,63.8 cw(c-9.232,62.857) -9.232,64.191 -8.65,64.191 -8.65,62.7 -7.65,62.7 ; -21.75,59.65 cw(c-20.8,59.65) -20.8,60.6 ; -21.75,59.65 cw(c-21.755,59.645) -21.748,59.645 -21.748,57.995 cw(c-23.018,57.995) -23.018,56.725 -25.93,56.725 ccw(c-25.93,55.455) -27.2,55.455 -27.2,35.055 -27.2,18.347 ccw(c-25.578,18.347) -26.725,17.2 -25.723,16.198 cw(c-27.891,14.03) -24.825,14.03 -24.825,7.195 ccw(c-21.759,7.195) -23.927,5.027 -23.827,4.927 -23.623,4.723 cw(c-25.791,2.555) -22.725,2.555 -22.725,0.3 ccw(c-21.725,0.3) -21.725,-0.7 -10.02,-0.7 cw(c-10.02,-1.97) -8.75,-1.97 -8.75,-4.269 -8.75,-9.2 ; -21.75,59.65 cw(c-20.8,59.65) -20.8,60.6 ; -20.8,60.6 -12.109,60.6 cw(c-12.109,58.707) -10.77,60.045 -10.175,59.45 ccw(c-9.33,60.295) -9.33,59.1 -9.225,59.1 -8.65,59.1 -8.65,60.6 -7.65,60.6 -7.65,58.03 ; -10.45,-13.95 ccw(c-10.45,-13.75) -10.25,-13.75 ; -10.45,-13.95 ccw(c-10.45,-13.75) -10.25,-13.75 ; -10.25,-13.75 -10.25,-10.7 ; -10.25,-13.75 -10.25,-10.7 ; -10.25,-10.7 -8.75,-9.2 ; -10.25,-10.7 -8.75,-9.2 ; -7.65,58.03 ccw(c-7.22,58.03) -7.22,57.6 ; -7.65,58.03 ccw(c-7.22,58.03) -7.22,57.6 ; -7.65,62.7 -7.65,65.12 ; -7.65,62.7 -7.65,65.12 ; -7.65,65.12 cw(c-7.27,65.12) -7.27,65.5 ; -7.65,65.12 cw(c-7.27,65.12) -7.27,65.5 ; -7.27,65.5 -5.9,65.5 ; -7.27,65.5 -5.9,65.5 ; -7.22,57.6 -5.9,57.6 ; -7.22,57.6 -5.9,57.6 ; -5.9,57.6 ccw(c-5.9,58) -5.5,58 ; -5.9,57.6 ccw(c-5.9,58) -5.5,58 ; -5.9,65.5 cw(c-5.9,65.1) -5.5,65.1 ; -5.9,65.5 cw(c-5.9,65.1) -5.5,65.1 ; -5.5,58 -5.5,61.5 ; -5.5,58 -5.5,61.5 ; -5.5,61.5 -5.5,65.1 ; -5.5,61.5 -5.5,65.1
Fab notes:
  lines w0.1: -27,7.1 -14.4,21 ; -12.9,24 -9.9,58.6 ; -27.7,3.5 ccw(c-27.7,4) -27.2,4 -27.2,7.1 -27.2,7.125 ccw(c-27.7,7.125) -27.7,7.625 -31.3,7.625 ccw(c-31.3,7.175) -31.75,7.175 -31.75,4.05 ccw(c-31.2,4.05) -31.2,3.5 -27.7,3.5 ; -27.7,3.5 ccw(c-27.7,3.5) -27.7,3.5 ; -23.75,-13.772 ccw(c-23.55,-13.772) -23.55,-13.972 -10.45,-13.972 ccw(c-10.45,-13.772) -10.25,-13.772 -10.25,-11.472 -23.75,-11.472 -23.75,-13.772 ; -15.5,61.3 ccw(c-14.8,61.3) -14.8,60.6 -12.1,60.6 cw(c-12.1,58.707) -10.761,60.045 -10.166,59.45 ccw(c-9.321,60.295) -9.321,59.1 -9.216,59.1 -8.641,59.1 -8.641,60.6 -7.641,60.6 -7.641,58.03 ccw(c-7.211,58.03) -7.211,57.6 -5.891,57.6 ccw(c-5.891,58) -5.491,58 -5.491,61.5 -5.491,65.1 ccw(c-5.891,65.1) -5.891,65.5 -7.261,65.5 ccw(c-7.261,65.12) -7.641,65.12 -7.641,62.7 -8.641,62.7 -8.641,64.191 -9.222,64.191 ccw(c-9.222,62.857) -10.166,63.8 -10.676,63.29 cw(c-12.1,64.714) -12.1,62.7 -14.8,62.7 ccw(c-14.8,62) -15.5,62 -15.5,61.3
  lines w0.2: -9.25,-12.35 -2.85,-9.85
  lines w0.381: 43.152,-12.429 53.564,-12.429 78.703,-12.429 110.698,-12.429 127.204,-12.429 139.139,-12.429 ; 43.152,-9.381 53.564,-9.381 78.703,-9.381 110.698,-9.381 127.204,-9.381 139.139,-9.381 ; 43.152,-6.333 53.564,-6.333 78.703,-6.333 110.698,-6.333 127.204,-6.333 139.139,-6.333 ; 43.152,-3.285 53.564,-3.285 78.703,-3.285 110.698,-3.285 127.204,-3.285 139.139,-3.285 ; 43.152,-0.237 53.564,-0.237 78.703,-0.237 110.698,-0.237 127.204,-0.237 139.139,-0.237 ; 43.152,2.811 53.564,2.811 78.703,2.811 110.698,2.811 127.204,2.811 139.139,2.811 ; 43.152,5.859 53.564,5.859 78.703,5.859 110.698,5.859 127.204,5.859 139.139,5.859 ; 43.152,8.907 53.564,8.907 78.703,8.907 110.698,8.907 127.204,8.907 139.139,8.907 ; 43.152,11.955 139.139,11.955 ; 53.564,15.003 53.564,-15.477 ; 78.703,15.003 78.703,-15.477 ; 110.698,15.003 110.698,-15.477 ; 127.204,15.003 127.204,-15.477 ; 53.564,-15.477 78.703,-15.477 ; 53.564,-15.477 43.152,-15.477 43.152,15.003 139.139,15.003 139.139,-15.477 127.204,-15.477 ; 78.703,-15.477 110.698,-15.477 ; 110.698,-15.477 127.204,-15.477
  text "These two PI stiffeners use the same material as the third one. The finished thickness is not important." at -13.825,17.75 h0.8
  text "This is meant to be the \"standard\" layer stack from KC website at 133um total thickness. The adhesve layers are listed as \"dielectric\"" at 43.092,17.131 h1.5
  text "Layer" at 44.93,12.717 h1.52
  text "Name" at 55.342,12.717 h1.52
  text "Material" at 80.481,12.717 h1.52
  text "Thickness" at 112.476,12.717 h1.52
  text "Gerber" at 128.982,12.717 h1.52
  text "Top Overlay" at 55.342,9.669 h1.52
  text "GTO" at 128.982,9.669 h1.52
  text "Top Coverlay" at 55.342,6.621 h1.52
  text "0.012mm" at 112.476,6.621 h1.52
  text "GTS" at 128.982,6.621 h1.52
  text "1" at 44.93,3.573 h1.52
  text "Top Layer" at 55.342,3.573 h1.52
  text "0.020mm" at 112.476,3.573 h1.52
  text "GTL" at 128.982,3.573 h1.52
  text "Dielectric 2" at 55.342,0.525 h1.52
  text "Composite dielectric" at 80.481,0.525 h1.52
  text "0.028mm" at 112.476,0.525 h1.52
  text "Dielectric 1" at 55.342,-2.523 h1.52
  text "Composite dielectric" at 80.481,-2.523 h1.52
  text "0.012mm" at 112.476,-2.523 h1.52
  text "Dielectric 3" at 55.342,-5.571 h1.52
  text "Composite dielectric" at 80.481,-5.571 h1.52
  text "0.028mm" at 112.476,-5.571 h1.52
  text "2" at 44.93,-8.619 h1.52
  text "Bottom Layer" at 55.342,-8.619 h1.52
  text "0.020mm" at 112.476,-8.619 h1.52
  text "GBL" at 128.982,-8.619 h1.52
  text "Bottom Coverlay" at 55.342,-11.667 h1.52
  text "0.012mm" at 112.476,-11.667 h1.52
  text "GBS" at 128.982,-11.667 h1.52
  text "Bottom Overlay" at 55.342,-14.715 h1.52
  text "GBO" at 128.982,-14.715 h1.52
  text "This PI stiffener to 0.3mm +/- 0.03mm finished thickness" at -1.775,-14.948 h0.8
  text "Bottom side stiffener in 3x designated regions" at 43.4,-20.65 h1.5
  text "Finish: immersion gold" at 42.942,-30.869 h1.5
  text "Coverlay: yellow/transparent (typical color)" at 42.942,-36.869 h1.5
  text "Silkscreen: white" at 42.95,-39.425 h1.5

## Text inside footprints (layer, text, board x,y; h text height)
P1: Top Assembly "Bottom stiffener to 0.3mm total thickness" at -23.775,-21.2 h0.8
P2: Top Overlay "+" at -6.625,63.85 h0.8 r270; Top Overlay "-" at -6.6,60.175 h0.8 r270